# Altium PCB Powersquare.PcbDoc
Units mm, origin at the board's own origin, x right, y up, seen from the top; angles counter-clockwise.
Board outline 75.82 x 74.68 mm, 2 copper layers (Top Layer, Bottom Layer); 2 components, 6 nets, 12 pads, 0 vias.
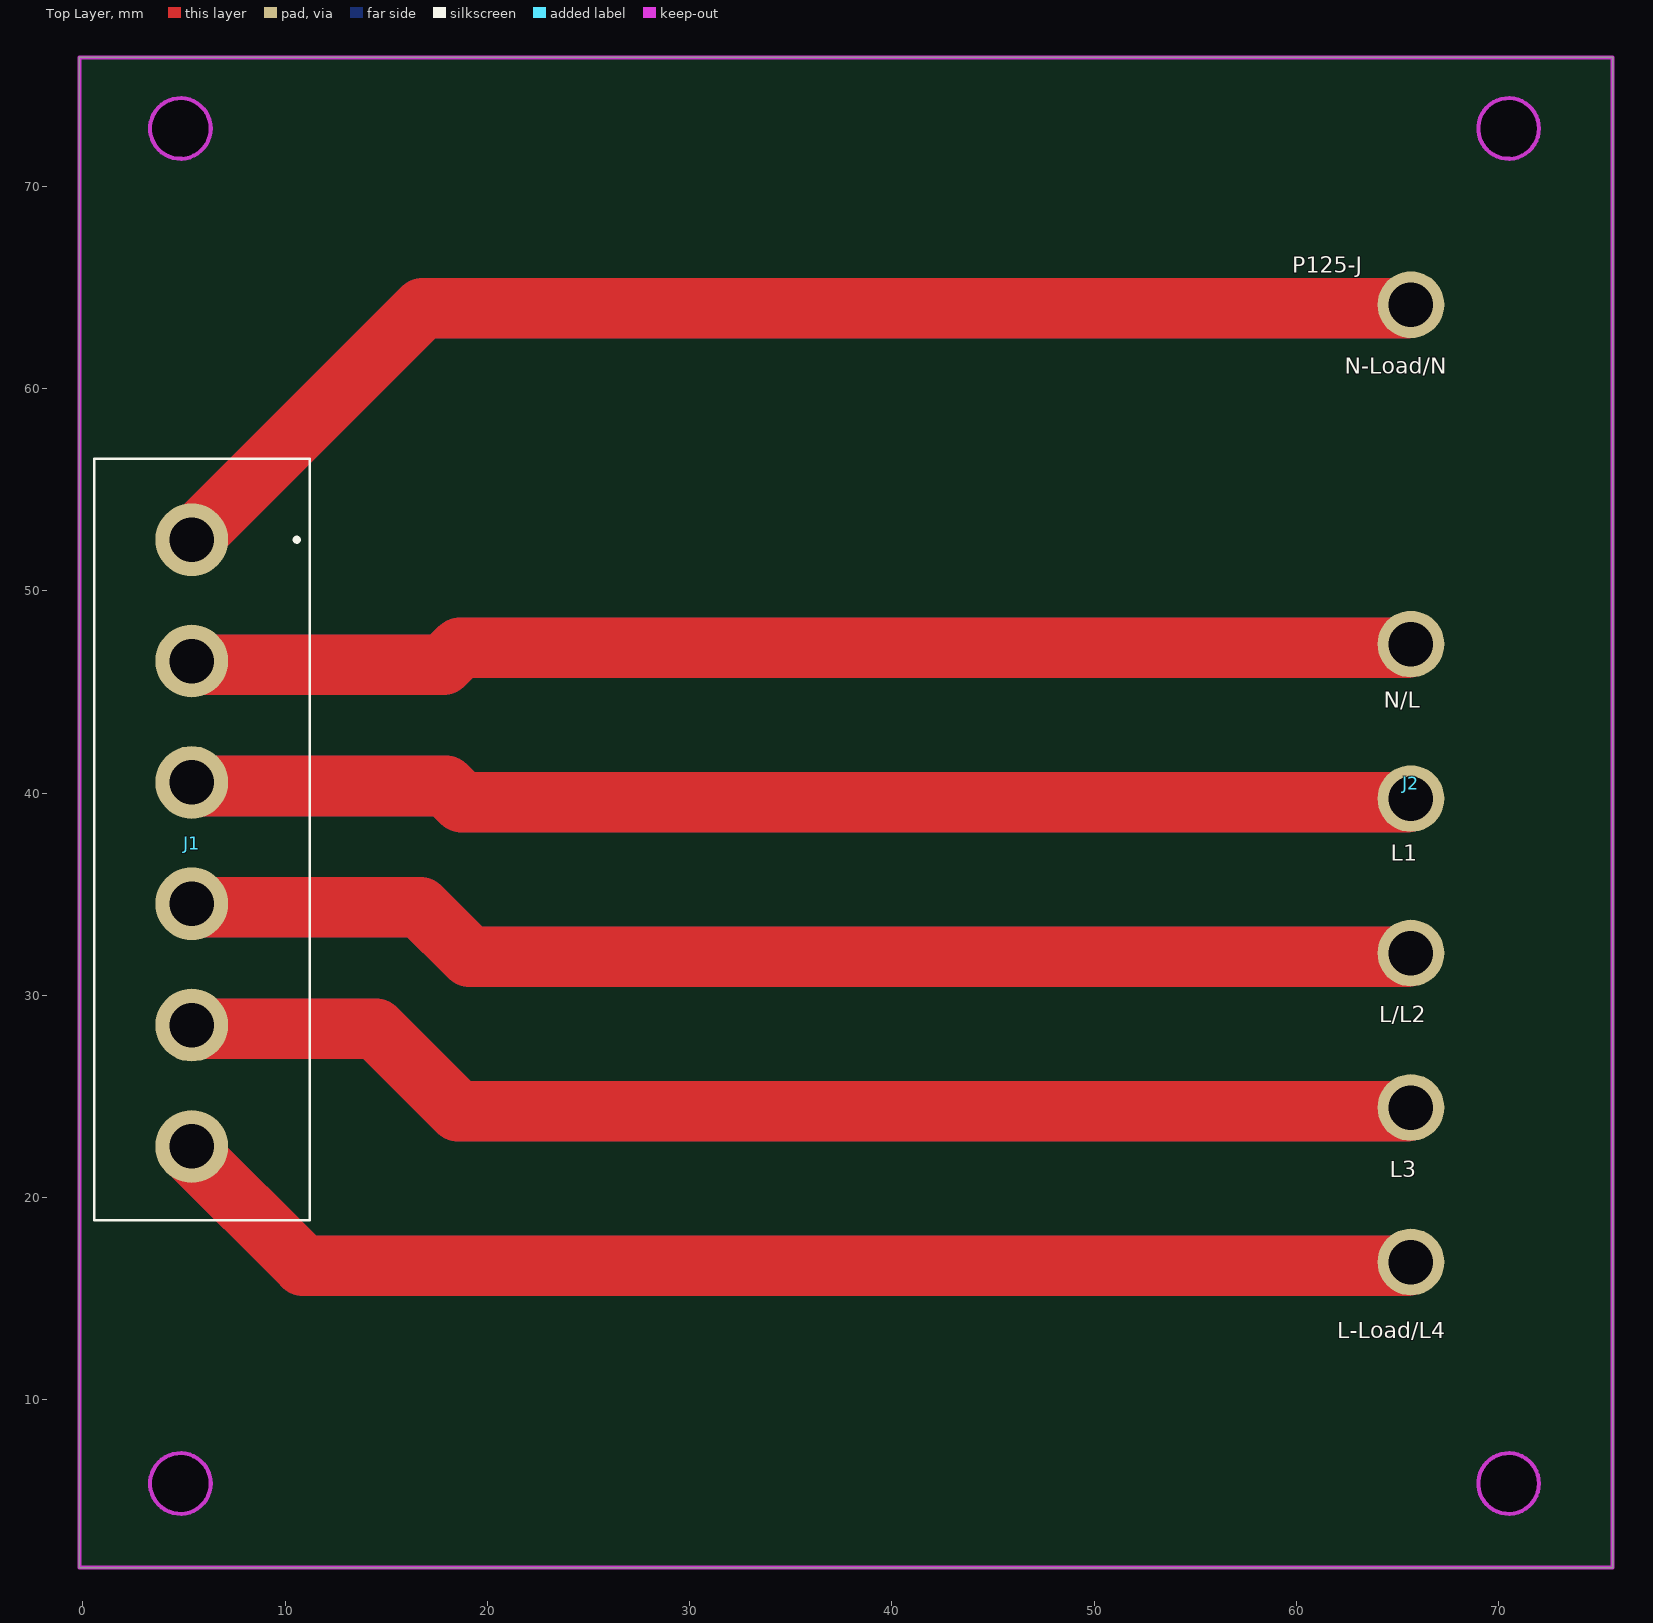
[diagram p0: Top Layer view]
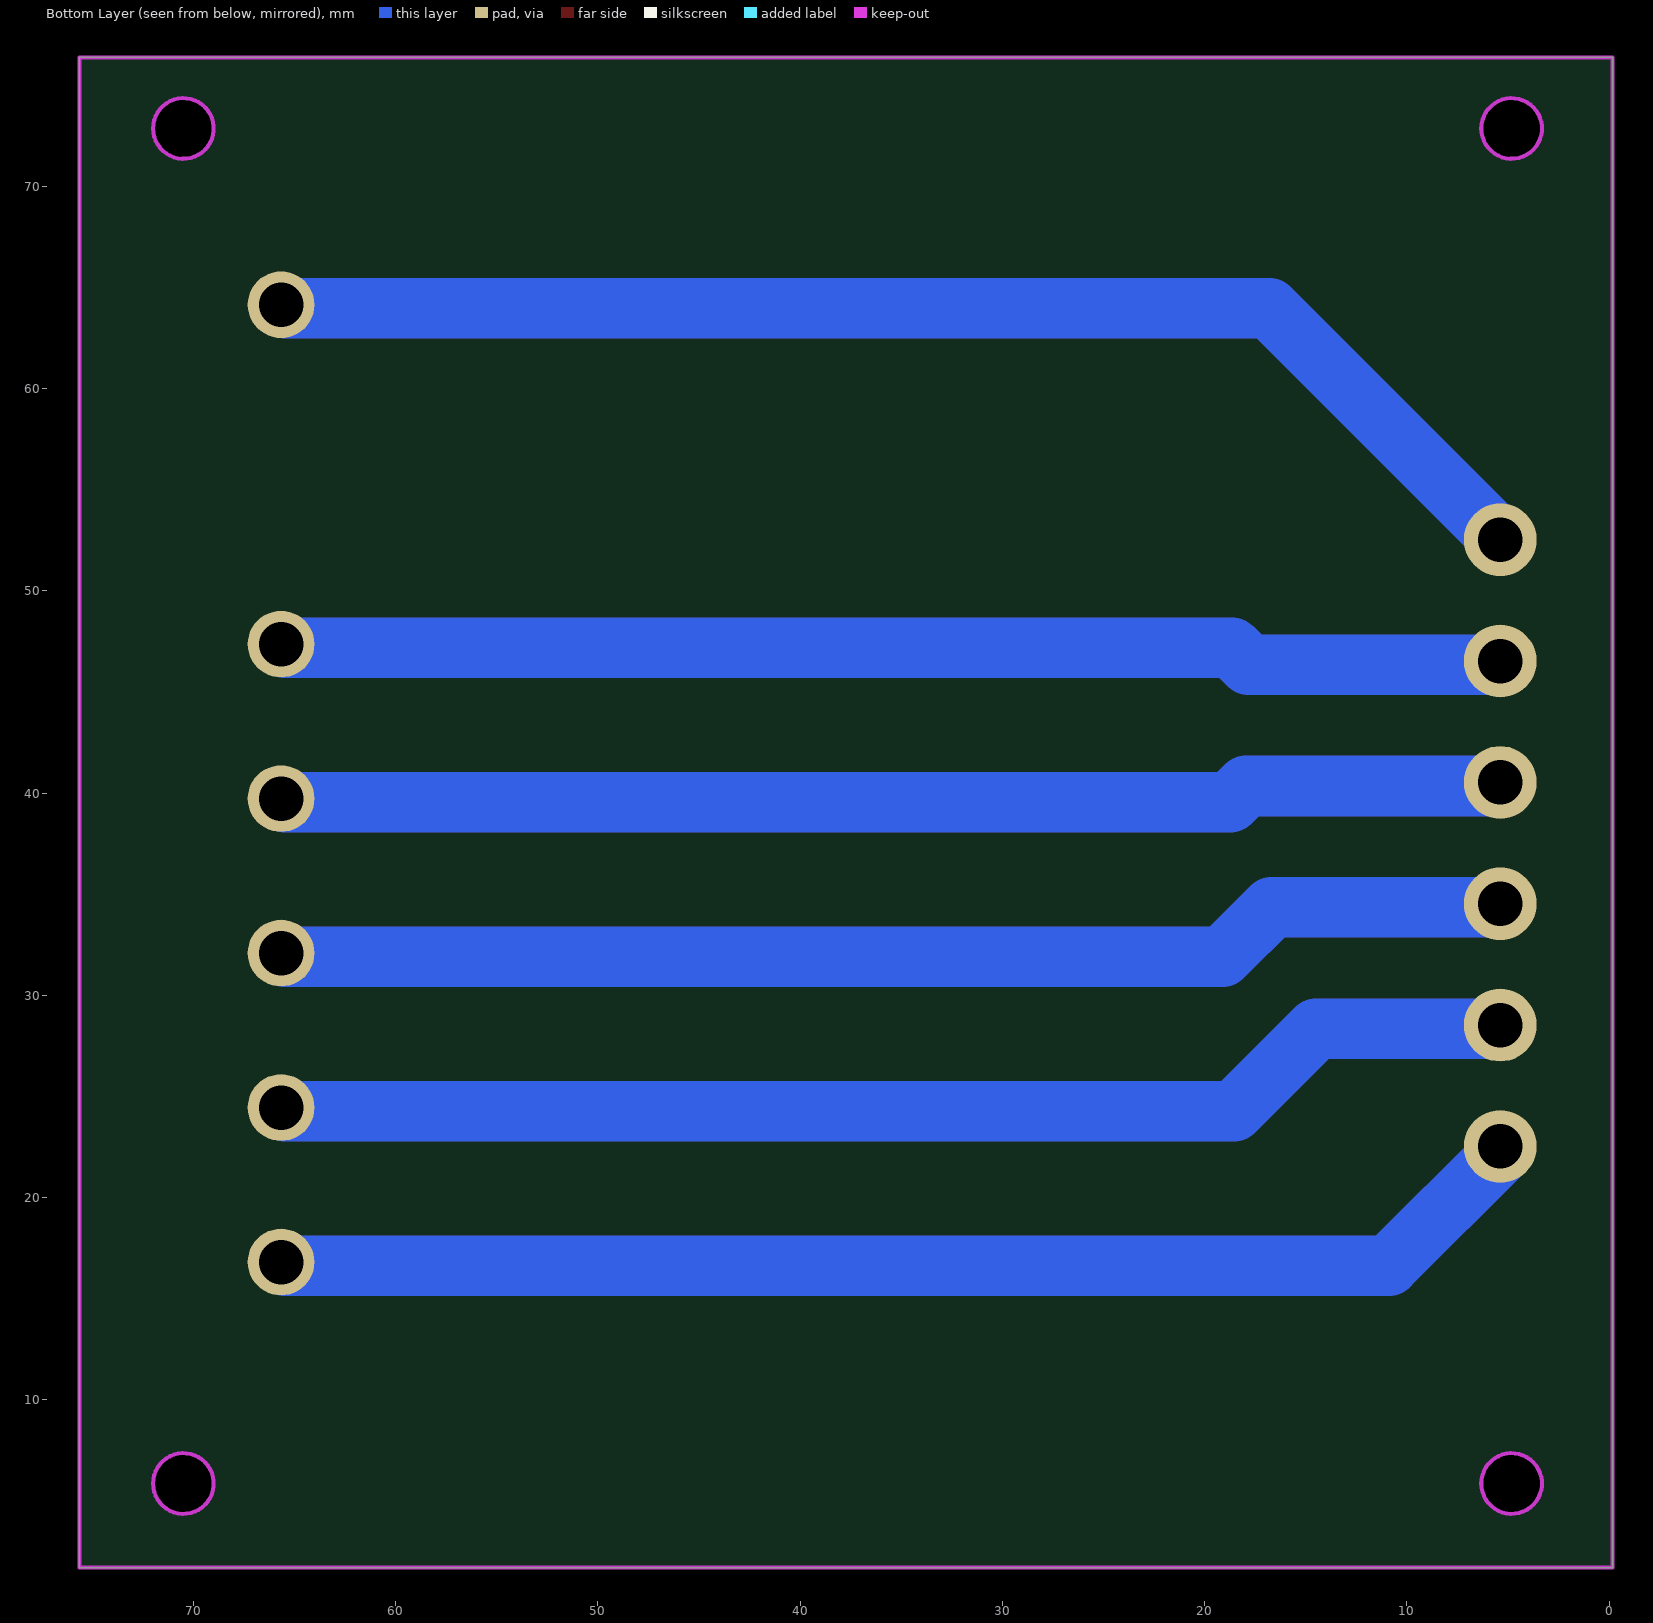
[diagram p1: Bottom Layer view, seen from below]

## Layer stack, top to bottom
Top Solder: solder mask 0.0102, Solder Resist, Dk 3.5
Top Layer: signal copper 0.0356
Dielectric 1: dielectric 0.32, FR-4, Dk 4.8
Bottom Layer: signal copper 0.0356
Bottom Solder: solder mask 0.0102, Solder Resist, Dk 3.5

## Board outline
-0.178,1.702 -0.178,76.378 75.641,76.378 75.641,1.702
cut-out: 6.378,5.893 cw(c4.878,5.893) 4.878,4.393 cw(c4.878,5.893) 3.378,5.893 cw(c4.878,5.893) 4.878,7.393 cw(c4.878,5.893)
cut-out: 70.493,4.359 ccw(c70.493,5.859) 71.993,5.859 ccw(c70.493,5.859) 70.493,7.359 ccw(c70.493,5.859) 68.993,5.859 ccw(c70.493,5.859)
cut-out: 4.822,71.359 ccw(c4.822,72.859) 6.322,72.859 ccw(c4.822,72.859) 4.822,74.359 ccw(c4.822,72.859) 3.322,72.859 ccw(c4.822,72.859)
cut-out: 70.493,71.359 ccw(c70.493,72.859) 71.993,72.859 ccw(c70.493,72.859) 70.493,74.359 ccw(c70.493,72.859) 68.993,72.859 ccw(c70.493,72.859)

## Design rules (kind name [scope] priority, off if disabled: settings)
Clearance [All] p1: gap=0.254 ignorepadtopadclearanceinfootprint=FALSE except(0: Arc-Hole Track-Hole SMDPad-Hole THPad-Hole Via-Hole Fill-Hole Poly-Hole Region-Hole Text-Hole)
PolygonConnect [All] p1: connectstyle=Relief reliefconductorwidth=0.254 reliefentries=4 polygonreliefangle="90 Angle" airgapwidth=0.254
RoutingVias [All] p1: holewidth=0.711 width=1.27 viastyle="Through Hole" minholewidth=0.711 minwidth=1.27 maxholewidth=0.711 maxwidth=1.27
SolderMaskExpansion [All] p1: expansion=0.102 istentingtop=FALSE
Width [All] p1: maxlimit=5 minlimit=0.254 preferedwidth=1
30 further rules are at their usual default settings.

## Components (designator, comment, footprint, x,y, rotation, side; value= is the part's Value field where it differs from the comment)
J1 "350543-1" TE_350543-1 5.385,52.524 r270 top
J2 "J4 AC" "J4 AC" 65.663,64.143 r0 top

## Footprints (in the part's own frame and the unit in brackets; to place one, negate y for a bottom-side part, rotate by r counter-clockwise, add the part's x,y. Pads: shape width x height; smd on the part's side, far side on the other; paste and mask are expansions set on the pad)
"J4 AC" [mm]
  round 3.3 hole 2.2: 1(0,-47.335) 2(0,-39.697) 3(0,-32.059) 4(0,-24.421) 5(0,-16.783) 6(0,0)
TE_350543-1 [mm]
  round 3.6 hole 2.2: 1(0,0) 2(6,0) 3(12,0) 4(18,0) 5(24,0) 6(30,0)
  silkscreen extent -4,-4.83 33.66,5.84

## Part data
J1: Package=None, Availability=Unavailable, MF="{'manufacturer': u'TE Connectivity'}", MP=350543-1, Price=None

## Nets (pads, with @x,y where several pads share a name; then routed paths per layer and width w, separated by ;. In a path a pad name is that pad's centre, name@x,y a point inside that pad or via, vN(x,y) a via of type N, cw(c..) or ccw(c..) an arc to the next point about the centre after c; other vN are vias at no path point)
NetJ1_1: J1.1 J2.6 | length 130.2
  Top Layer w3: J1.1@5.182,52.346 16.801,63.966 J2.6@65.46,63.966
  Bottom Layer w3: J1.1@5.182,52.346 16.801,63.966 J2.6@65.46,63.966
NetJ1_2: J1.2 J2.5 | length 121.2
  Top Layer w3: J1.2@5.182,46.346 17.822,46.346 18.658,47.183 J2.5@65.46,47.183
  Bottom Layer w3: J1.2@5.182,46.346 17.822,46.346 18.658,47.183 J2.5@65.46,47.183
NetJ1_3: J1.3 J2.4 | length 121.2
  Top Layer w3: J1.3@5.182,40.346 17.947,40.346 18.748,39.545 J2.4@65.46,39.545
  Bottom Layer w3: J1.3@5.182,40.346 17.947,40.346 18.748,39.545 J2.4@65.46,39.545
NetJ1_4: J1.4 J2.3 | length 122.6
  Top Layer w3: J1.4@5.182,34.346 16.682,34.346 19.122,31.906 J2.3@65.46,31.906
  Bottom Layer w3: J1.4@5.182,34.346 16.682,34.346 19.122,31.906 J2.3@65.46,31.906
NetJ1_5: J1.5 J2.2 | length 123.9
  Top Layer w3: J1.5@5.182,28.346 14.478,28.346 18.556,24.269 J2.2@65.46,24.269
  Bottom Layer w3: J1.5@5.182,28.346 14.478,28.346 18.556,24.269 J2.2@65.46,24.269
NetJ1_6: J1.6 J2.1 | length 125.3
  Top Layer w3: J1.6@5.182,22.346 10.897,16.631 J2.1@65.46,16.631
  Bottom Layer w3: J1.6@5.182,22.346 10.897,16.631 J2.1@65.46,16.631

## Keep-outs
Keep-Out Layer:
  circle w0.2: c70.493,5.859 r1.5
  circle w0.2: c4.822,5.859 r1.5
  circle w0.2: c4.822,72.859 r1.5
  circle w0.2: c70.493,72.859 r1.5
  lines w0.2: -0.178,1.702 75.641,1.702 75.641,76.378 -0.178,76.378 -0.178,1.702

## Silkscreen, mask and mechanical layers (free items; w line width, h text height)
Top Overlay:
  text "P125-J" at 59.792,65.735 h0.8
  text "N-Load/N" at 62.382,60.731 h0.8
  text "N/L" at 64.313,44.221 h0.8
  text "L1" at 64.668,36.652 h0.8
  text "L/L2" at 64.11,28.677 h0.8
  text "L3" at 64.618,21.006 h0.8
  text "L-Load/L4" at 62.027,13.03 h0.8